# Altium PCB PCB1.PcbDoc
Units mil, origin at the board's own origin, x right, y up, seen from the top; angles counter-clockwise.
Board outline 3845.03 x 3510.03 mil, 2 copper layers (Top Layer, Bottom Layer); 50 components, 27 nets, 227 pads, 57 vias.
Unrouted connection lines stored in the file: 5.
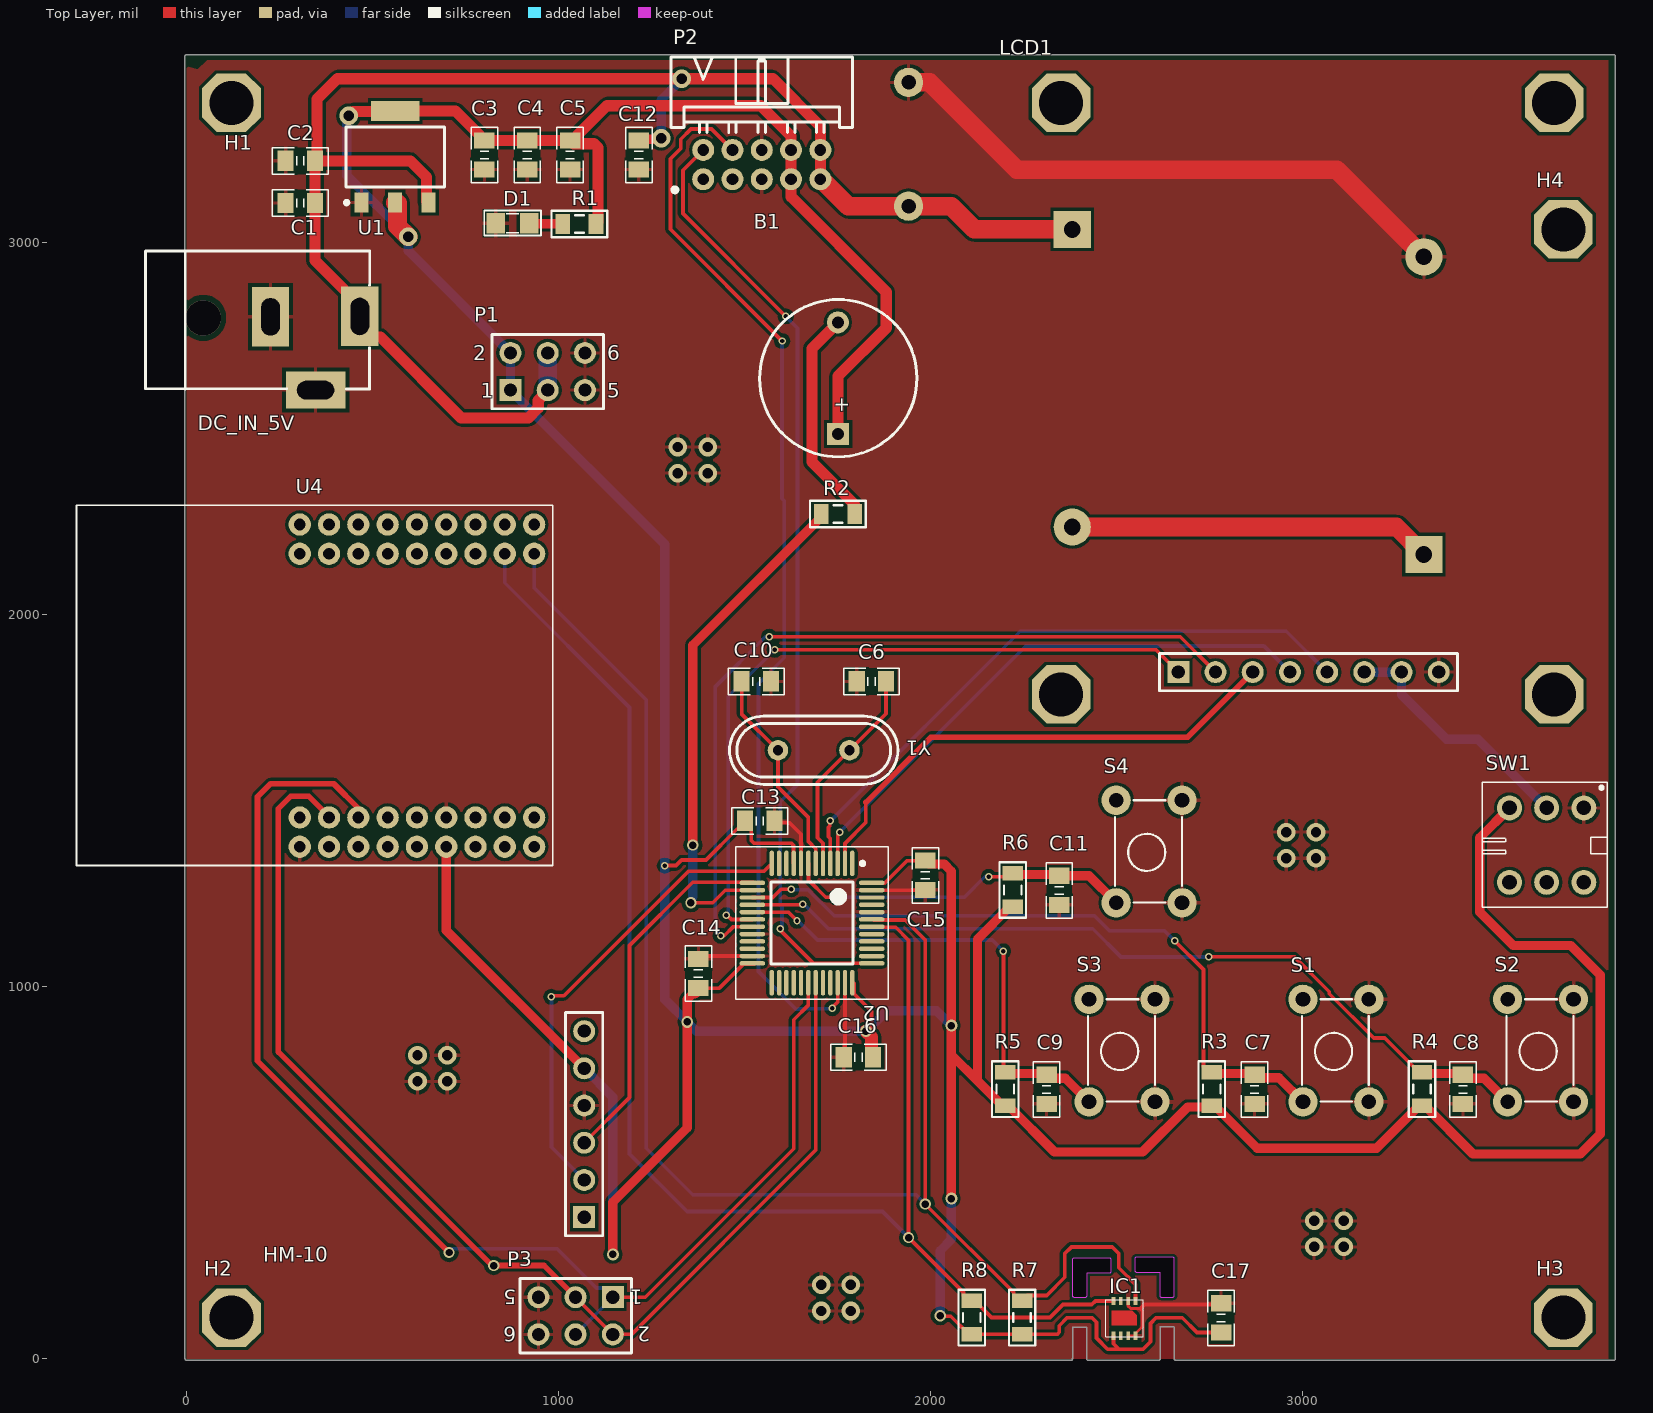
[diagram p0: Top Layer view]
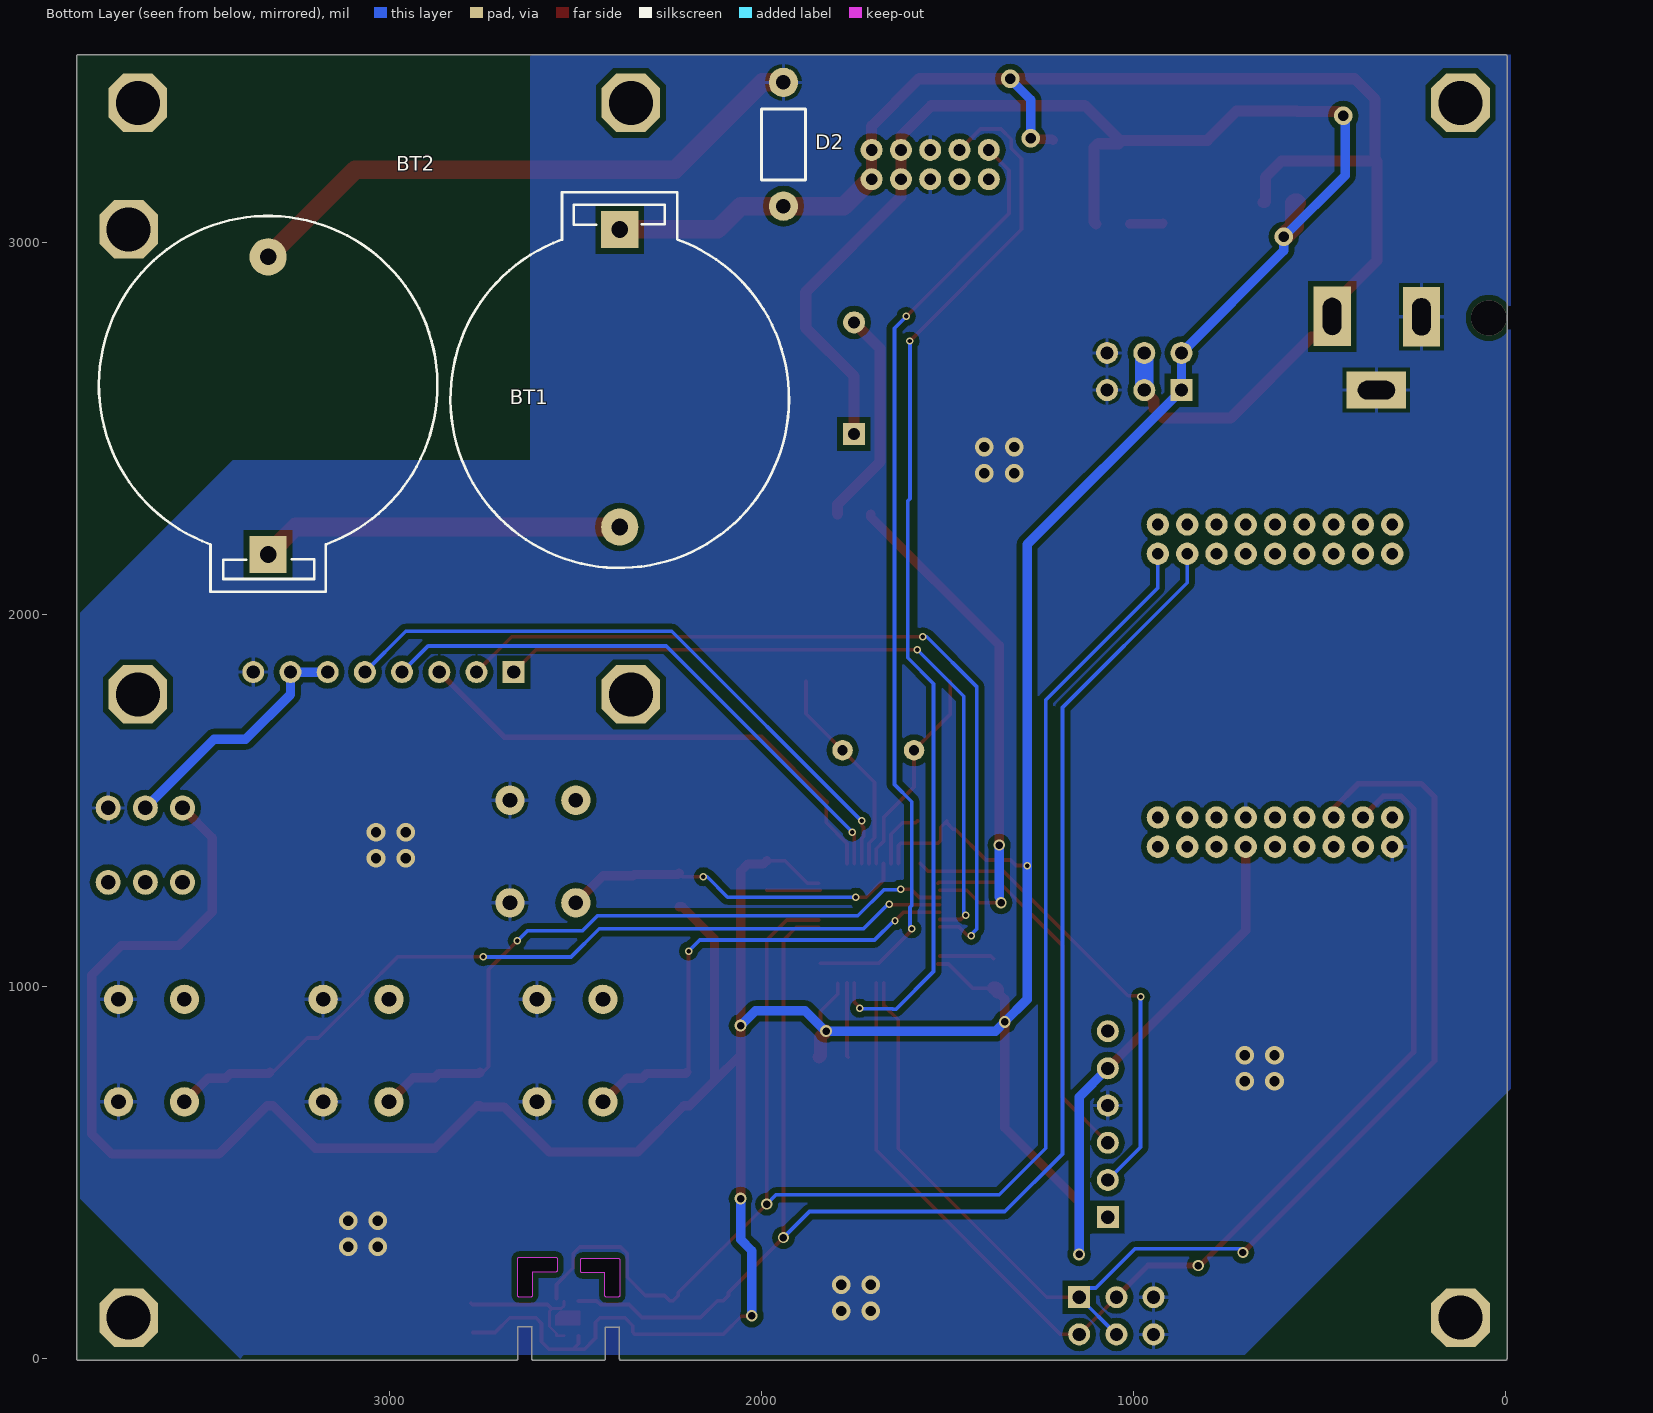
[diagram p1: Bottom Layer view, seen from below]

## Layer stack, top to bottom
Top Solder: solder mask 0.4, Solder Resist, Dk 3.5
Top Layer: signal copper 1.4
Dielectric 1: dielectric 12.6, FR-4, Dk 4.8
Bottom Layer: signal copper 1.4
Bottom Solder: solder mask 0.4, Solder Resist, Dk 3.5

## Board outline
0,-5.02 2375.75,-5.02 ccw(c2375.75,0) 2380.76,0 2380.76,84.24 2418.53,84.24 2418.53,0 ccw(c2423.55,0) 2423.55,-5.02 2611.38,-5.02 ccw(c2611.38,0) 2616.39,0 2616.39,84.98 2654.16,84.98 2654.16,0 ccw(c2659.18,0) 2659.18,-5.02 3835,-5.02 ccw(c3835,0) 3840.02,0 3840.02,240 ccw(c3835,240) 3840.01,240.04 3840.02,3500 ccw(c3835,3500) 3835,3505.02 0,3505.02 ccw(c0,3500) -5.02,3500 -5.02,0 ccw(c0,0)
cut-out: 2379.99,170 ccw(c2385,170) 2385,164.98 2415,164.98 ccw(c2415,170) 2420.01,170 2420.01,229.98 2480,229.98 ccw(c2480,235) 2485.01,235 2485.01,265 ccw(c2480,265) 2480,270.02 2385,270.02 ccw(c2385,265) 2379.99,265
cut-out: 2547.74,237.5 ccw(c2552.76,237.5) 2552.76,232.48 2614.62,232.48 2614.62,170 ccw(c2619.63,170) 2619.63,164.98 2649.63,164.98 ccw(c2649.63,170) 2654.65,170 2654.65,267.5 ccw(c2649.63,267.5) 2649.63,272.52 2552.76,272.52 ccw(c2552.76,267.5) 2547.74,267.5

## Design rules (kind name [scope] priority, off if disabled: settings)
Clearance [All] p1: gap=8 ignorepadtopadclearanceinfootprint=TRUE except(15: Arc-Text Arc-Hole Track-Text Track-Hole SMDPad-Text SMDPad-Hole THPad-Text THPad-Hole Via-Text Via-Hole Fill-Text Fill-Hole Poly-Text Poly-Hole Region-Text Region-Hole Text-Text Text-Hole)
HoleSize [All] p1: absolutevalues=TRUE maxlimit=10000 minlimit=1 maxpercent=80.000 minpercent=20.000
PolygonConnect [All] p1: connectstyle=Relief reliefconductorwidth=10 reliefentries=4 polygonreliefangle="90 Angle" airgapwidth=10
RoutingVias [All] p1: holewidth=28 width=50 viastyle="Through Hole" minholewidth=12 minwidth=20 maxholewidth=28 maxwidth=50
SolderMaskExpansion [All] p1: expansion=4
Width [All] p1: maxlimit=50 minlimit=10 preferedwidth=25
29 further rules are at their usual default settings.

## Components (designator, comment, footprint, x,y, rotation, side; value= is the part's Value field where it differs from the comment)
B1 "BUZZER" SPEAKER 1750.5,2485 r90 top
BT1 "CR2032" PIN3V 2380,3035 r270 bottom
BT2 "CR2032" PIN3V 3325,2161.25 r90 bottom
C1 "10uF" C0805 305,3105.98 r0 top
C2 "0.1uF" C0805 305,3219.25 r0 top
C3 "10uF" C0805 800,3235 r90 top
C4 "1uF" C0805 915,3235 r270 top
C5 "0.1uF" C0805 1030,3235 r90 top
C6 "22pF" C0805 1840,1820 r0 top value=0.22uF
C7 "0.1uF" C0805 2870,723.4 r90 top
C8 "0.1uF" C0805 3430,723.4 r90 top
C9 "0.1uF" C0805 2310.9,723.4 r90 top
C10 "22pF" C0805 1530.63,1820 r180 top value=0.22uF
C11 "0.1uF" C0805 2345,1258.4 r90 top
C12 "0.1uF" C0805 1215,3235 r90 top
C13 "0.1uF" C0805 1540,1445 r180 top
C14 "0.1uF" C0805 1375,1035 r270 top
C15 "0.1uF" C0805 1985,1298.82 r90 top
C16 "0.1uF" C0805 1805,810 r0 top
C17 "0.1uF" C0805 2780,109.37 r270 top
D1 "LED" "LED SMD 0805" 875,3048.85 r180 top
D2 "Zener Diode" "Zener Diode" 1940,3260 r270 bottom
DC_IN_5V "DC-IN" DC-IN 465,2801 r0 top (schematic designator U3)
H1 "HOLE" HOLE 120,3375 r0 top
H2 "HOLE" HOLE 120,110 r0 top
H3 "HOLE" HOLE 3700,110 r0 top
H4 "HOLE" HOLE 3700,3035 r0 top
HM-10 "HC-05" HC-05 1068,380 r90 top (schematic designator *1)
IC1 "SHT31" DFN-8 2550,155 r270 top
LCD1 "LCD 5110" "LCD 5110" 2665,1845 r0 top
P1 "Header 3X2" HDR2X3 870,2602.94 r0 top
P2 "Header 5x2" "Header 5x2 horizontal (2.54mm)" 1545,3325 r0 top
P3 "Header 3X2" HDR2X3 1145,165 r180 top
R1 "1k" R0805 1055,3049.54 r180 top value=100R
R2 "1k" R0805 1750,2270 r180 top value=100R
R3 "10k" R0805 2755,724.39 r90 top value=100R
R4 "10k" R0805 3320,724.39 r90 top value=100R
R5 "10k" R0805 2200,724.39 r90 top value=100R
R6 "10k" R0805 2220,1259.39 r90 top value=100R
R7 "10k" R0805 2245,110 r90 top value=100R
R8 "10k" R0805 2110,110 r90 top value=100R
S1 "SWITCH" "SW 4PIN" 3177.17,965.59 r270 top
S2 "SWITCH" "SW 4PIN" 3727.17,965.59 r270 top
S3 "SWITCH" "SW 4PIN" 2602.17,965.59 r270 top
S4 "SWITCH" "SW 4PIN" 2675,1500.59 r270 top
SW1 "Button 6pin" "BT 6pin" 3755,1480 r270 top
U1 "AMS1117" "SOT223 - 3 LEAD" 560,3230 r90 top
U2 "STM32F103C8T6" LQFP48_7x7 1884.33,1374.96 r270 top
U4 "NRF51822-36pin_module" NRF51822_Module 303.56,1375.63 r90 top
Y1 "8MHz" XTAL_HC-49/U 1685,1635 r0 top

## Footprints (in the part's own frame and the unit in brackets; to place one, negate y for a bottom-side part, rotate by r counter-clockwise, add the part's x,y. Pads: shape width x height; smd on the part's side, far side on the other; paste and mask are expansions set on the pad)
"BT 6pin" [mm] "2 state button"
  round 1.7 hole 1: 1(0,0) 2(0,-2.54) 3(0,-5.08) 4(5.08,-5.08) 5(5.08,-2.54) 6(5.08,0)
  silkscreen extent -1.76,-6.92 6.79,1.6, body extent -1.71,-6.9 6.79,1.6, height 14.5
C0805 [mm]
  rect 1.1x1.397 smd: 1(-1,0) 2(1,0)
  Top Layer pour cut-out: -0.4,0.9 -0.4,-0.9 0.4,-0.9 0.4,0.9
  silkscreen extent -1.9,-0.9 1.9,0.9, body extent -1.09,-0.73 1.11,0.72, height 0.9
DC-IN [mil] "Jac DC input"
  rect 100x160 hole 50 slot 100 at 90 deg: 1(0,0) 2(-240,-1)
  rect 160x100 hole 50 slot 100 at 0 deg: 3(-119,-198)
  silkscreen extent -576,-195 26,176, body extent -576,-195 26,173, height 434
DFN-8 [mm]
  rect 0.55x0.25 smd mask+0.025: 1(0,0) 2(0,-0.5) 3(0,-1) 4(0,-1.5) 5(2.38,-1.5) 6(2.38,-1) 7(2.38,-0.5) 8(2.38,0)
  Top Layer region: 0.68,-1.62 0.695,-1.635 1.67,-1.635 1.67,0.07 0.97,0.07 0.68,-0.22
  silkscreen extent -0.08,-2.02 2.45,0.52, body extent -0.08,-2.01 2.44,0.49, height 0.9
HC-05 [mm]
  rect 1.5x1.5 hole 0.9: 1(0,0)
  round 1.5 hole 0.9: 2(2.54,0) 3(5.08,0) 4(7.62,0) 5(10.16,0) 6(12.7,0)
  silkscreen extent -1.27,-1.27 13.97,1.27, body extent -1.65,-4.7 14.35,34.72, height 6.45
HDR2X3 [mm] "Connector; Header; 3x2 Position"
  rect 1.5x1.5 hole 0.9: 1(0,0)
  round 1.5 hole 0.9: 2(0,2.54) 3(2.54,0) 4(2.54,2.54) 5(5.08,0) 6(5.08,2.54)
  silkscreen extent -1.27,-1.27 6.35,3.81
"Header 5x2 horizontal (2.54mm)" [mm]
  round 1.5 hole 0.8: 1(-3.989,-3.94) 2(-3.989,-1.94) 3(-1.989,-3.94) 4(-1.989,-1.94) 5(0.011,-3.94) 6(0.011,-1.94) 7(2.011,-3.94) 8(2.011,-1.94) 9(4.011,-3.94) 10(4.011,-1.94)
  silkscreen extent -6.18,-4.82 6.2,4.41, body extent -6.18,-4.19 6.2,4.41, height 6.54
HOLE [mm]
  oct 4x4 hole 3: H(0,0)
"LCD 5110" [mm]
  rect 1.5x1.5 hole 0.9: 1(0,0)
  round 1.5 hole 0.9: 2(2.54,0) 3(5.08,0) 4(7.62,0) 5(10.16,0) 6(12.7,0) 7(15.24,0) 8(17.78,0)
  oct 4x4 hole 3: ""(-8.001,-1.524) ""(-8.001,38.862) ""(25.654,-1.524) ""(25.654,38.862)
  silkscreen extent -1.27,-1.27 19.05,1.27, body extent -12.46,-4 30.24,41.4, height 14
"LED SMD 0805" [mil] "Compoment SMD 80x50mil"
  rect 50x55 smd: 1(-45.39,-2.58) 2(44.61,-2.58)
  silkscreen extent -77,-37 76,30, body extent -41,-21 41,15, height 33
LQFP48_7x7 [mm]
  oval 1.75x0.3 smd: 1(1.12,-2.428) 2(1.12,-2.928) 3(1.12,-3.428) 4(1.12,-3.928) 5(1.12,-4.428) 6(1.12,-4.928) 7(1.12,-5.428) 8(1.12,-5.928) 9(1.12,-6.428) 10(1.12,-6.928) 11(1.12,-7.428) 12(1.12,-7.928) 25(9.27,-7.928) 26(9.27,-7.428) 27(9.27,-6.928) 28(9.27,-6.428) 29(9.27,-5.928) 30(9.27,-5.428) 31(9.27,-4.928) 32(9.27,-4.428) 33(9.27,-3.928) 34(9.27,-3.428) 35(9.27,-2.928) 36(9.27,-2.428)
  oval 0.3x1.75 smd: 13(2.445,-9.253) 14(2.945,-9.253) 15(3.445,-9.253) 16(3.945,-9.253) 17(4.445,-9.253) 18(4.945,-9.253) 19(5.445,-9.253) 20(5.945,-9.253) 21(6.445,-9.253) 22(6.945,-9.253) 23(7.445,-9.253) 24(7.945,-9.253) 37(7.945,-1.103) 38(7.445,-1.103) 39(6.945,-1.103) 40(6.445,-1.103) 41(5.945,-1.103) 42(5.445,-1.103) 43(4.945,-1.103) 44(4.445,-1.103) 45(3.945,-1.103) 46(3.445,-1.103) 47(2.945,-1.103) 48(2.445,-1.103)
  silkscreen extent 0,-10.38 10.4,0.02, body extent 0.7,-9.68 9.7,-0.68, height 1.45
NRF51822_Module [mm]
  round 1.524 hole 0.8: 1(0,0) 2(2,0) 3(0,-2) 4(2,-2) 5(0,-4) 6(2,-4) 7(0,-6) 8(2,-6) 9(0,-8) 10(2,-8) 11(0,-10) 12(2,-10) 13(0,-12) 14(2,-12) 15(0,-14) 16(2,-14) 17(0,-16) 18(2,-16) 19(20,0) 20(22,0) 21(20,-2) 22(22,-2) 23(20,-4) 24(22,-4) 25(20,-6) 26(22,-6) 27(20,-8) 28(22,-8) 29(20,-10) 30(22,-10) 31(20,-12) 32(22,-12) 33(20,-14) 34(22,-14) 35(20,-16) 36(22,-16)
  silkscreen extent -1.29,-17.27 23.32,15.24
PIN3V [mil] "Socket PIN 3V"
  rect 100x100 hole 45: 1(0,0)
  round 100 hole 45: 2(800,0)
  silkscreen extent -100,-455 910,455, body extent -128,-447 1002,449, height 278
R0805 [mil]
  rect 39.37x55 smd: 1(-45,0) 2(45,0)
  Top Layer pour cut-out: -25,35.43 -25,-35.43 25,-35.43 25,35.43
  silkscreen extent -75,-35 75,35, body extent -39,-24 39,24, height 28
"SOT223 - 3 LEAD" [mm] "SOT223, 4-Leads, Body 6.7x6.7mm (max), Pitch 2.29mm, IPC Medium Density"
  rect 1.35x0.95 smd: 1(-3.125,2.29) 2(-3.125,0) 3(-3.125,-2.29)
  rect 1.35x3.3 smd: 4(3.125,0)
  silkscreen extent -3.25,-3.35 2.05,3.44, body extent -3.54,-3.25 3.54,3.25, height 1.65
SPEAKER [mm]
  rect 1.5x1.5 hole 0.8: 1(0,0)
  round 1.5 hole 0.8: 2(7.62,0.013)
  silkscreen extent -1.55,-5.38 9.18,5.36, body extent -2.22,-6 13.24,6, height 4.5
"SW 4PIN" [mm] "SW button 4pin, 250 x250 mil"
  round 2 hole 1: 1(0,0) 1(7,0) 2(0,-4.5) 2(7,-4.5)
  silkscreen extent 0,-4.57 6.98,0, body extent -0.52,-5.39 7.38,0.81, height 7
XTAL_HC-49/U [mm] "HC-49/U Leaded Cristal, Body 11.05x4.8mm; Pitch 4.88mm"
  round 1.4 hole 0.7: 1(-2.44,0) 2(2.44,0)
  silkscreen extent -5.75,-2.33 5.75,2.33, body extent -5.75,-2.33 5.75,2.33, height 3.5
"Zener Diode" [mm]
  round 2 hole 1: 1(-4.32,0) 2(4.13,0)
  silkscreen extent -2.49,-1.5 2.35,1.52

## Part data
BT1 BT2: library part Battery, "Multicell Battery", LatestRevisionDate=17-Jul-2002, LatestRevisionNote="Re-released for DXP Platform.", PackageReference=BAT-2, Published=24-Mar-1999, Publisher="Altium Limited"
C1 C3: library part EMK212BB7106MG-T, "CAP CER 10UF 16V X7R 0805", Detailed Value="10UF 16V X7R", Manufacture="Taiyo Yuden", Operating Temperature="-55°C ~ 125°C", Temperature Coefficient=X7R, Tolerance=±20%, Voltage Rated=16V, Category=Capacitor, Creator=Quyen.nv, Datasheet=#http://www.yuden.co.jp/productdata/catalog/mlcc06_e.pdf#, Link sale=#https://www.digikey.com/product-detail/en/taiyo-yuden/EMK212BB7106MG-T/587-3319-1-ND/4157364#, Mounting type="Surface Mount", Partnumber=EMK212BB7106MG-T, Pricing (USD)=0.57, Supplier=Digikey
C2 C5 C7 C8 C9 C11 C12 C13 C14 C15 C16 C17: library part C0805C104K4RACTU, "CAP CER 0.1UF 16V X7R 0805", Detailed Value=0.1uF-16V, Manufacture=KEMET, Operating Temperature="-55° to 125°C", Temperature Coefficient=X7R, Tolerance=±10%, Voltage Rated=16V, Category=Capacitor, Creator=Tunn, Datasheet=#https://api.kemet.com/component-edge/download/datasheet/C0805C104K4RACTU.pdf#, Link sale=#https://www.digikey.com/product-detail/en/kemet/C0805C104K4RACTU/399-1167-1-ND/411442#, Mounting type="Surface Mount", Partnumber=C0805C104K4RACTU, Pricing (USD)=0.22, Supplier=Digikey
C4: library part GMK212B7105KG-T, "CAP CER 1UF 35V X7R 0805", Detailed Value="1UF 35V X7R", Manufacture="Taiyo Yuden", Operating Temperature=35V, Temperature Coefficient=X7R, Tolerance=±10%, Category=Capacitor, Creator=Quyen.nv, Datasheet=#http://www.yuden.co.jp/productdata/catalog/mlcc06_e.pdf#, Link sale=#https://www.digikey.com/product-detail/en/taiyo-yuden/GMK212B7105KG-T/587-1438-1-ND/1004069#, Mounting type="Surface Mount", Partnumber=GMK212B7105KG-T, Pricing (USD)=0.31, Supplier=Digikey, Voltage Rated=35V
C6 C10: library part C0805C224K3RACAUTO, "CAP CER 0.22pF 0805", Detailed Value=0.22uF-25V-0805, Manufacture=KEMET, Operating Temperature="-55°C ~ 125°C", Temperature Coefficient=X7R, Tolerance=±10%, Voltage Rated=25, Category=Capacitor, Creator=Quyen.nv, Link sale=#https://www.digikey.com/product-detail/en/kemet/C0805C224K3RACAUTO/399-6947-1-ND/3314455#, Mounting type="Surface Mount", Partnumber=C0805C224K3RACAUTO, Supplier=Digikey
D2: "General SCH for Zener Diode"
DC_IN_5V: library part JACK-DC, "Provide DC Voltage"
IC1: "Sensirion Humidity & Temperature Sensor"
P1 P3: "Header, 3-Pin, Dual row", LatestRevisionDate=17-Jul-2002, LatestRevisionNote="Re-released for DXP Platform.", Publisher="Altium Limited"
P2: library part "Header 5x2 (2.54mm)", "Header 5x2 ,used for ST-Link"
R1 R2 R3 R4 R5 R6 R7 R8: library part RC0805FR-07100RL, "RES SMD 100 OHM 1% 1/8W 0805", Detailed Value="100R 1% 1/8W", Manufacture=Yageo, Operating Temperature="-55°C ~ 155°C", Temperature Coefficient=±100ppm/°C, Tolerance=1%, Category=Resistor, Creator=Quyen.nv, Link sale=#https://www.digikey.com/product-detail/en/yageo/RC0805FR-07100RL/311-100CRCT-ND/730490#, Mounting type="Surface Mount", Partnumber=RC0805FR-07100RL, Pricing (USD)=0.1, Supplier=Digikey
SW1: library part "Button 6-pin 2-state", "General Pin 2, unpush 2-1 - push 2-3"
U2: library part STM32F103C8T6-Multi-part, "STM32F103C8T6-LQFP48"
U4: library part NRF51822-Mudule
Y1: library part XTAL, "Crystal Oscillator", LatestRevisionDate=17-Jul-2002, LatestRevisionNote="Re-released for DXP Platform.", PackageReference=R38, Published=8-Jun-2000, Publisher="Altium Limited"
S1 S2 S3 S4: LatestRevisionDate=17-Jul-2002, LatestRevisionNote="Re-released for DXP Platform.", PackageReference=SPST-2, Published=24-Mar-1999, Publisher="Altium Limited"

## Via types
v1: diameter 50, hole 28, Top Layer to Bottom Layer, 24 vias
v2: diameter 20, hole 12, Top Layer to Bottom Layer, 20 vias
v3: diameter 30, hole 20, Top Layer to Bottom Layer, 6 vias
v4: diameter 32, hole 20, Top Layer to Bottom Layer, 6 vias
v5: diameter 94.49, hole 94.49, Top Layer to Bottom Layer, 1 vias

## Nets (pads, with @x,y where several pads share a name; then routed paths per layer and width w, separated by ;. In a path a pad name is that pad's centre, name@x,y a point inside that pad or via, vN(x,y) a via of type N, cw(c..) or ccw(c..) an arc to the next point about the centre after c; other vN are vias at no path point)
+3.3: B1.1 C3.2 C4.1 C5.2 C13.2 C14.2 C15.2 C16.2 C17.2 HM-10.5 IC1.5 P1.1 P1.2 P2.7 P2.8 R1.1 R3.1 R4.1 R5.1 R6.1 R7.1 R8.1 SW1.3 U1.2 U1.4 U2.1 U2.9 U2.24 U2.36 U2.48 U4.11 | length 15401
  Top Layer w10: v2(1285,1325) 1315,1325 1330,1340 1395.63,1340 1478.13,1422.5 1483.98,1422.5 1500.63,1439.15 C13.2 1517.28,1428.35 1517.28,1392.41 1524.69,1385 1625.04,1385 1630.91,1379.13 1630.91,1331.21 U2.9 ; C14.2 1431.46,995.63 1496.46,1060.63 U2.24@1525,1060.63 ; U2.36@1793.7,1008.46 1793.7,979.92 1840.22,933.41 1840.22,864.78 ; U2.48@1845.87,1277.17 1874.41,1277.17 1935.43,1338.19 C15.2 ; v4(2025,115) 2026.34,113.66 2053.52,113.66 2102.19,65 R8.1 R7.1 2339.14,65 2345,70.86 2345,88.44 2366.54,109.98 2432.51,109.98 2445,97.5 2445,55 2475,25 2505.87,25 ; IC1.5 2490.87,61.22 2490.87,40 2505.87,25 ; C17.2@2774.15,70 2715,70 2675.63,109.37 2605,109.37 2590,94.37 2590,45 2570,25 2505.87,25
  Top Layer w25: U4.11 697.26,1150.74 HM-10.5 ; v4(1145,280) 1145,420 1345,620 v4(1345,905) 1345,965.63 C14.2@1365,985.63 ; C15.2 1994.15,1329.03 2035.97,1329.03 2055,1310 v4(2055,895) 2055,816.57 ; v4(2055,430) 2055,816.57 ; R6.1 2212.19,1214.39 2125,1127.2 2125,746.57 ; SW1.3 3475,1400 3475,1200 3565,1110 3720,1110 3799.04,1030.96 3799.04,603.68 3745.36,550 3457.2,550 3327.81,679.39 R4.1 3312.19,679.39 3197.8,565 2877.2,565 2762.81,679.39 R3.1 2751.81,676.2 2690,676.2 2568.8,555 2332.2,555 2207.81,679.39 R5.1 2192.19,679.39 2125,746.57 ; 2055,816.57 2125,746.57
  Top Layer w30: v1(435,3340) 446.46,3351.46 558.43,3351.46 U1.4 722.18,3353.03 800,3275.22 C3.2 C4.1 C5.2 ; R1.1 1105,3054.54 1105,3255 1094.78,3265.22 1039.15,3265.22 C5.2 ; B1.1 1750.5,2640.5 1880,2770 1880,2866.97 1624.18,3122.79 P2.7 P2.8 1624.18,3285.82 1542.5,3367.5 1128.98,3367.5 1035.85,3274.37 C5.2
  Top Layer w35: C14.2@1365,985.63 1365,991.48 1369.15,995.63 C14.2 ; v4(1825,880) 1840.22,864.78 1840.22,814.15 C16.2
  Top Layer w50: U1.2 564.72,3106.97 566.3,3105.39 566.3,3043.66 v1(594.96,3015)
  Bottom Layer w25: v1(435,3340) 430,3335 430,3179.96 v1(594.96,3015) 594.96,2977.98 P1.2 P1.1 1285,2187.94 v2(1285,1325) 1285,965 v4(1345,905) 1370,880 v4(1825,880) 1826.89,880 1881.89,935 2015,935 v4(2055,895) ; HM-10.5 1145,703 v4(1145,280) ; v4(2025,115) 2025,290 2055,320 v4(2055,430)
+5: BT1.1 C1.2 C2.2 C12.2 D2.2 DC_IN_5V.1 P1.3 P1.4 P2.9 P2.10 U1.3 | length 4356.8
  Top Layer w25: C12.2 1217.82,3277.18 1272.18,3277.18 v1(1275,3280)
  Top Layer w30: U1.3 645.43,3106.97 643.86,3108.54 643.86,3176.14 600.75,3219.25 C2.2 ; P1.3 970,2600.49 944.53,2575.01 944.53,2554.77 918.17,2528.41 737.59,2528.41 520,2746 490,2746 465,2771 DC_IN_5V.1 465,2831 344.37,2951.63 C1.2 C2.2 ; P2.9 P2.10 1702.92,3312.08 1575,3440 v1(1330,3440) 405,3440 350,3385 350,3224.88 C2.2
  Top Layer w50: P2.9 1705.37,3169.88 1777.85,3097.4 D2.2 2054.37,3097.4 2116.77,3035 BT1.1
  Bottom Layer w25: v1(1275,3280) 1275,3383.24 1330,3438.24 v1(1330,3440)
  Bottom Layer w50: P1.3 P1.4
BT1: C7.2 R3.2 S1.2 U2.15 | length 1872.9
  Top Layer w10: U2.15 1575.18,1239.33 1597.39,1261.54 v2(1625.04,1261.54) ; v2(2655,1123) 2732.5,1045.5 2732.5,784.07 2747.19,769.39 R3.2
  Top Layer w25: R3.2 2758.31,766.08 2866.69,766.08 C7.2 2877.77,755 2935,755 S1.2@3000,690
  Bottom Layer w10: v2@1630,1260 1670,1260 1740,1190 2440,1190 2480,1150 2628.11,1150 2653.74,1124.37 v2@2655,1124.37
BT2: C8.2 R4.2 S2.2 U2.16 | length 2249
  Top Layer w10: U2.16 1520.39,1219.99 1653.5,1219.99 v2(1655.04,1221.54) ; v2(2747.19,1080.32) 2976.31,1080.32 3070.92,985.7 3070.92,980.8 3190.22,861.5 3220.07,861.5 3312.19,769.39 R4.2
  Top Layer w25: R4.2 3323.31,766.08 3426.69,766.08 C8.2 3439.15,753.62 3486.38,753.62 S2.2@3550,690
  Bottom Layer w10: v2@1660,1220 1725,1155 2435,1155 2510.63,1079.37 2746.24,1079.37 v2(2747.19,1080.32)
BT3: C9.2 R5.2 S3.2 U2.17 | length 1298.4
  Top Layer w10: U2.17 1616.61,1199.96 v2(1640.04,1176.54) ; v2(2195,1095) 2195,774.39 R5.2
  Top Layer w25: R5.2 2203.31,766.08 2307.59,766.08 C9.2 2320.06,753.62 2361.38,753.62 S3.2@2425,690
  Bottom Layer w10: v2@1645,1175 1695,1125 2165,1125 v2(2195,1095)
BUZZ: R2.2 U2.14 | length 1352
  Top Layer w10: v3(1355,1225) 1413.5,1225 1447.52,1259.02 U2.14
  Top Layer w25: v3(1360,1380) 1360,1917.19 1705,2262.19 R2.2
  Bottom Layer w25: 1360,1240 v3(1360,1380)
CE: LCD1.2 U2.19 | length 2213.5
  Top Layer w10: v2(1435.04,1136.54) 1444.54,1136.54 1468.25,1160.24 1519.69,1160.24 U2.19 ; v2(1565,1940) 2670,1940 LCD1.2
  Bottom Layer w10: v2@1440,1135 1420,1155 1420,1805 1555,1940 v2(1565,1940)
CLK: LCD1.5 U2.4 | length 1710
  Top Layer w10: U2.4 1729.68,1397.89 1725,1402.57 1725,1427.43 1728.09,1430.51 1728.09,1443.09 v2(1730,1445)
  Bottom Layer w10: v2(1730,1445) 2240,1955 2955,1955 LCD1.5
DC: LCD1.3 U2.2 | length 1372.3
  Top Layer w10: U2.2 1769.06,1384.56 1825,1440.5 1825,1495
  Top Layer w15: 1825,1495 2000,1670 2690,1670 LCD1.3
DIN: LCD1.4 U2.3 | length 1532.6
  Top Layer w10: U2.3 1749.37,1406.66 1755,1412.29 v2(1755,1415)
  Bottom Layer w10: v2(1755,1415) 2255,1915 2895,1915 LCD1.4
GND: BT2.2 C1.1 C2.1 C3.1 C4.2 C5.1 C6.1 C7.1 C8.1 C9.1 C10.1 C11.1 C12.1 C13.1 C14.1 C15.1 C16.1 C17.1 D1.2 D2.1 DC_IN_5V.2 DC_IN_5V.3 HM-10.4 IC1.2 IC1.7 IC1.8 LCD1.8 P1.5 P1.6 P2.5 P2.6 P3.5 P3.6 S1.1 S2.1 S3.1 S4.1 SW1.1 U1.1 U2.8 U2.20 U2.23 U2.35 U2.44 U2.47 U4.1 U4.12 | length 2611.9
  Top Layer w8: IC1.7 IC1.8 2550,67.05 2568.8,85.85 2568.8,127.35 2561.16,135 2536.17,135 2530.32,140.86 IC1.2
  Top Layer w10: C14.1 1382.48,1081.85 U2.23 ; C13.1 1584.37,1440 1620,1440 1650.94,1409.06 U2.8 ; C16.1 1769.06,813.42 U2.35 ; U2.47 1984.57,1259.02 C15.1 ; 2563.49,134.36 2574.12,144.98 2776.25,144.98 C17.1
  Top Layer w50: D2.1 1996.69,3430.08 2231.14,3195.63 3090.62,3195.63 BT2.2
  other v1: 1705,127.85 1785,127.85 1705,197.85 1785,197.85 3030,300 3110,300 3030,370 3110,370 620,745 700,745 700,815 2955,1345 3035,1345 2955,1415 3035,1415 1320,2380 1400,2380 1320,2450 1400,2450
JTCK: P2.2 U2.37 | length 2555.7
  Top Layer w10: P2.2 1333.43,3194.09 1333.43,3077.57 v2(1610,2801) ; v2(1595.04,1154.67) 1595.04,1151.96 1600.04,1146.96 1600.04,1146.54 1684.41,1062.17 U2.37
  Bottom Layer w10: v2@1600,1153.13 1600,1212.67 1595,1217.67 1595,1496.73 1641.5,1543.23 1641.5,2769.5 v2(1610,2801) v2@1608.09,2799.09
JTMS: P2.4 U2.34 | length 2893.6
  Top Layer w10: P2.4 1410.32,3305 1355,3305 1327.5,3277.5 1327.5,3252.5 1299.88,3224.88 1299.88,3035.12 v2(1600,2735) ; v2(1735.04,941.54) 1735.04,944.24 1749.37,958.57 U2.34
  Bottom Layer w10: v2(1600,2735) 1600,2310.93 1606,2304.93 1606,1883.57 1536.38,1813.95 1536.38,1040.12 1637.35,939.14 1645.64,939.14 1646.5,940 v2@1735.04,940
NetB1_2: B1.2 R2.1 | length 591.6
  Top Layer w30: B1.2 1680,2715 1680,2410 1795,2295 R2.1
NetBT1_2: BT1.2 BT2.1 | length 975.5
  Top Layer w50: BT1.2 3251.25,2235 BT2.1
NetD1_1: D1.1 R1.2 | length 90.4
  Top Layer w25: D1.1 921.34,3050.48 1009.06,3050.48 R1.2
NetLCD1_6: LCD1.6 LCD1.7 SW1.2 | length 676.3
  Bottom Layer w25: LCD1.6 LCD1.7 3265,1785 3385.59,1664.41 3470.59,1664.41 SW1.2
NRST: C11.2 R6.2 S4.2 U2.7 | length 950.1
  Top Layer w10: U2.7 1670.98,1330.52 1670.98,1286.55 1717.53,1240 v2(1745,1240) ; v2(2155,1295) 2210.61,1295 R6.2
  Top Layer w25: R6.2 2223.31,1301.08 2341.69,1301.08 C11.2 2425.06,1297.77 S4.2@2497.83,1225
  Bottom Layer w10: v2(1745,1240) 2090,1240 2145,1295 v2(2155,1295)
OSC_IN: C6.2 U2.5 Y1.2 | length 571.7
  Top Layer w10: U2.5 1710,1385 1695,1400 1695,1548.94 Y1.2 1879.37,1733.31 C6.2
OSC_OUT: C10.2 U2.6 Y1.1 | length 571.6
  Top Layer w10: C10.2 1491.26,1732.68 Y1.1 1588.94,1536.06 1670.63,1454.37 1670.63,1390 1690.32,1370.31 U2.6
RST2: LCD1.1 U2.18 | length 1949.8
  Top Layer w10: v2(1450.04,1191.54) 1452.75,1191.54 1464.01,1180.28 U2.18 ; v2(1580,1905) 2605,1905 LCD1.1
  Bottom Layer w10: v2@1455,1191.54 1455,1780 v2(1580,1905)
RX1: P3.2 P3.3 U2.31 U4.4 | length 3243.2
  Top Layer w10: v3@820,250 v3(825,250) ; P3.3 P3.2 1195,65 1690.32,560.32 U2.31
  Top Layer w15: U4.4 382.3,1456.95 327.38,1511.87 279.74,1511.87 246.06,1478.19 246.06,823.94 v3@820,250 ; v3(825,250) 960,250 P3.3
RXD2: HM-10.3 U2.13 | length 987.1
  Top Layer w10: HM-10.3 1190,702 1190,1110 1360,1280 1522.17,1280 U2.13@1525,1277.17
SCL1: IC1.4 R8.2 U2.42 U4.33 | length 4165.9
  Top Layer w10: U2.42@1845.87,1159.06 1905.32,1159.06 1940,1124.37 v3(1940,325) 2087.5,177.5 2087.5,169.69 2102.19,155 R8.2 2117.81,155 2162.5,110.31 2320.31,110.31 2354.99,144.98 2432.43,144.98 2442.37,154.92 2490.87,154.92 IC1.4
  Bottom Layer w10: U4.33 854.74,2085.26 1190,1750 1190,550 1345,395 1870,395 v3(1940,325)
SDA1: IC1.1 R7.2 U2.43 U4.35 | length 4283.7
  Top Layer w10: U2.43@1845.87,1178.74 1931.26,1178.74 1985,1125 v3(1985,415) 2222.5,177.5 2222.5,169.69 2237.19,155 R7.2 2259.69,169.69 2311.09,169.69 2359.98,218.58 2359.98,282.43 2377.55,300 2487.45,300 2505.02,282.43 2505.02,244.12 2550,199.14 IC1.1@2550,160.83
  Bottom Layer w10: U4.35 933.48,2071.52 1235,1770 1235,565 1360,440 1960,440 v3(1985,415)
TX1: P3.1 P3.4 U2.30 U4.6 | length 3531.4
  Top Layer w10: P3.1 1232.17,165 1631.26,564.09 1631.26,910.63 1670.63,950 U2.30
  Top Layer w15: U4.6 461.04,1478.96 395,1545 225,1545 190,1510 190,800 v3(705,285)
  Bottom Layer w10: v3(705,285) 705,289.14 710.86,295 995,295 1100.47,189.53 1120.47,189.53 P3.1 P3.4
TXD2: HM-10.2 U2.12 | length 1271.1
  Top Layer w10: v2@980,975 1013.46,975 1348.46,1310 1551.34,1310 U2.12
  Bottom Layer w10: v2@980,975 v2(980,972) 980,568 HM-10.2
pads on no net: H1.H H2.H H3.H H4.H HM-10.1 HM-10.6 IC1.3 IC1.6 LCD1. P2.1 P2.3 SW1.4 SW1.5 SW1.6 U2.10 U2.11 U2.21 U2.22 U2.25 U2.26 U2.27 U2.28 U2.29 U2.32 U2.33 U2.38 U2.39 U2.40 U2.41 U2.45 U2.46 U4.2 U4.3 U4.5 U4.7 U4.8 U4.9 U4.10 U4.13 U4.14 U4.15 U4.16 U4.17 U4.18 U4.19 U4.20 U4.21 U4.22 U4.23 U4.24 U4.25 U4.26 U4.27 U4.28 U4.29 U4.30 U4.31 U4.32 U4.34 U4.36
copper on no net:
  other v1: 620,815
  other v5: 44,2797

## Polygon pours and split planes (outlines as drawn)
GND on Top Layer "Top Layer-GND 2" (solid, pour order 28): 30,3465 55,3490 3820,3490 3820,0 0,0 0,3470 -5,3475
GND on Top Layer "Top Layer-GND" (solid, pour order 4): 2035.97,890
GND on Top Layer "Top Layer-GND 1" (solid, pour order 6): 205,3485
GND on Bottom Layer "Bottom Layer-GND" (solid, pour order 24): 2615,3505 2620,3500 2620,2415 3420,2415 3830,2005 3830,430 3400,0 3390,10 700,10 -15,725 -15,3505

## Silkscreen, mask and mechanical layers (free items; w line width, h text height)
Drill Drawing:
  lines w10: 2385,235 2385,265 2405,265 2480,265 2480,235 2415,235 2415,230 2415,170 2385,170 2385,230 2385,245 ; 2619.63,267.5 2649.63,267.5 2649.63,247.5 2649.63,170 2619.63,170 2619.63,237.5 2614.63,237.5 2552.76,237.5 2552.76,267.5 2614.63,267.5 2629.63,267.5 ; 3595,0 3625,0 3835,0 ; 3835,240 3835,210 3835,0 ; 3835,0 3835,3500 0,3500 0,0 2375.75,0 2375.75,89.25 2423.55,89.25 2423.55,0 2611.38,0 2611.38,90 2659.18,90 2659.18,0 3835,0

## Text inside footprints (layer, text, board x,y; h text height)
B1: Top Overlay "+" at 1778.5,2540.5 h39.37 r90
P1: Top Overlay "1" at 790,2582.94 h39.37; Top Overlay "2" at 770,2682.94 h39.37; Top Overlay "5" at 1130,2582.94 h39.37; Top Overlay "6" at 1130,2682.94 h39.37
P3: Top Overlay "1" at 1225,185 h39.37 r180; Top Overlay "2" at 1245,85 h39.37 r180; Top Overlay "5" at 885,185 h39.37 r180; Top Overlay "6" at 885,85 h39.37 r180